# Altium PCB main_pcb_v0.PcbDoc (part 2 of 2)
Units mil, origin at the board's own origin, x right, y up, seen from the top; angles counter-clockwise.
Board outline 9550 x 4600 mil, 2 copper layers (Top Layer, Bottom Layer); 82 components, 133 nets, 564 pads, 44 vias.
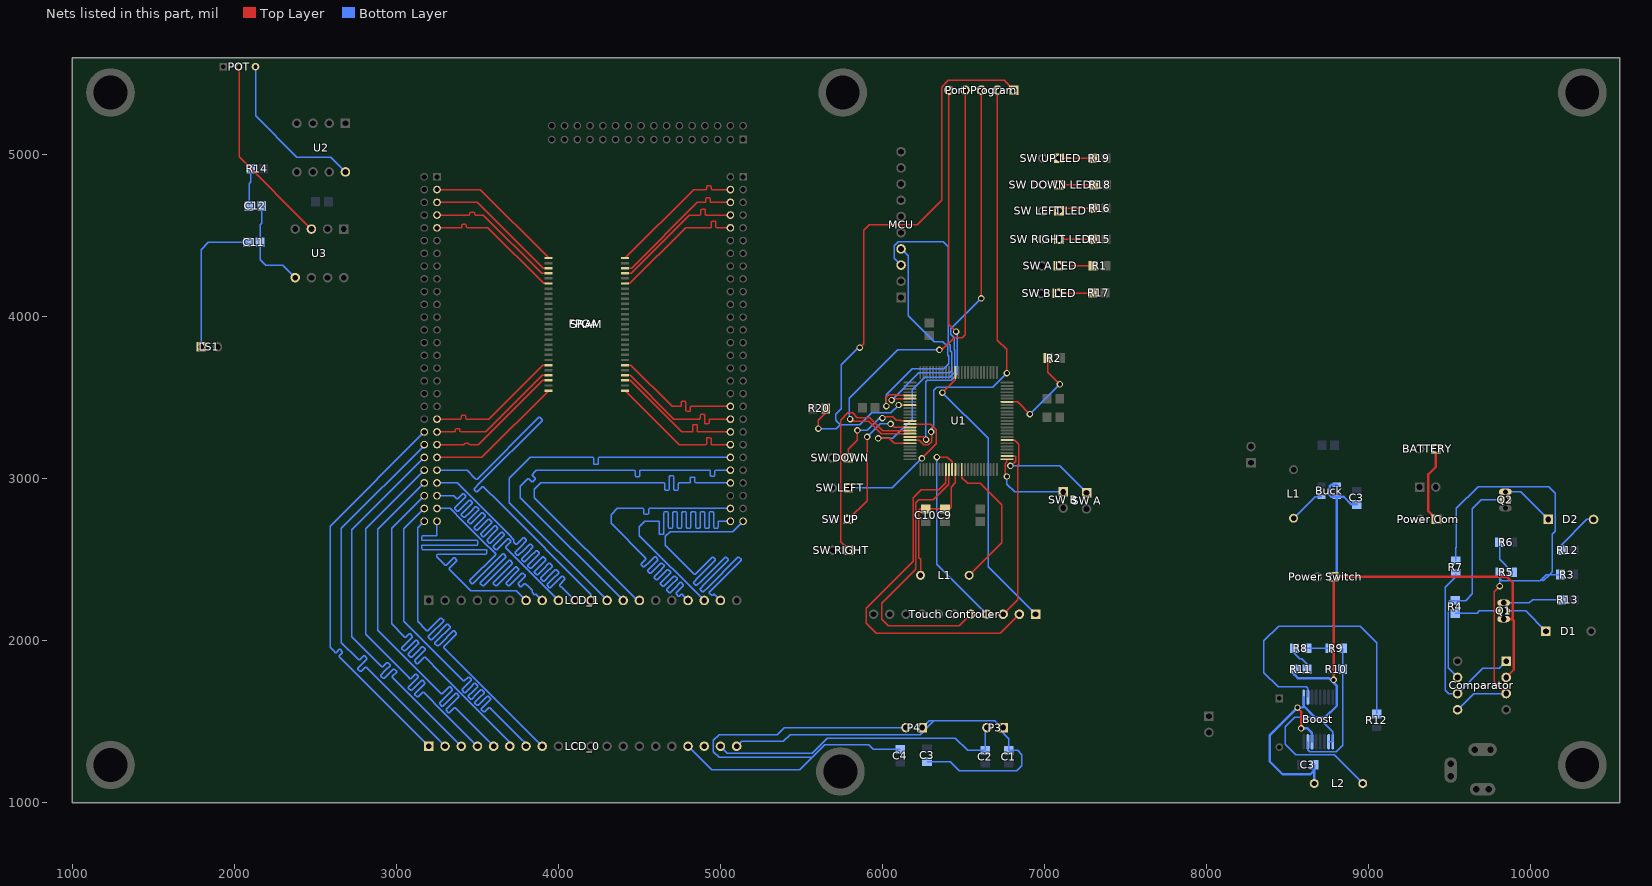
[diagram p2: the nets of this part, all layers, seen from the top]

## Via types
v1: diameter 40, hole 25, Top Layer to Bottom Layer, 44 vias

## Nets (pads, with @x,y where several pads share a name; then routed paths per layer and width w, separated by ;. In a path a pad name is that pad's centre, name@x,y a point inside that pad or via, vN(x,y) a via of type N, cw(c..) or ccw(c..) an arc to the next point about the centre after c; other vN are vias at no path point) (continued)
GREEN0: FPGA.143 LCD_1.7 | length 2495.8
  Bottom Layer w8: FPGA.143@3250.24,2739.02 3250.24,2690 3250.24,2676 3250.24,2652.2 3246.04,2648 3159.06,2648 3154.86,2643.8 3154.86,2624.2 3159.06,2620 3250.24,2620 3498.1,2620 3502.3,2615.8 3502.3,2596.2 3498.1,2592 3250.24,2592 3159.06,2592 3154.86,2587.8 3154.86,2568.2 3159.06,2564 3250.24,2564 3554.1,2564 3558.3,2559.8 3558.3,2540.2 3554.1,2536 3254.44,2536 3250.24,2531.8 3250.24,2518.17 3274.2,2494.2 3284.1,2484.3 3300.93,2467.47 3306.87,2467.47 3352.84,2513.44 3358.78,2513.44 3372.64,2499.58 3372.64,2493.64 3326.67,2447.67 3326.67,2441.73 3373.4,2395 3458.4,2310 3738.34,2310 3798.34,2250 LCD_1.7@3800,2250
GREEN1: FPGA.141 LCD_1.8 | length 2495.6
  Bottom Layer w8: FPGA.141@3250.24,2817.76 3332.24,2817.76 3410,2740 3527.5,2622.5 3611.64,2538.36 3611.64,2532.42 3452.42,2373.2 3452.42,2367.26 3466.28,2353.4 3472.22,2353.4 3634.41,2515.59 3655.8,2536.98 3661.74,2536.98 3675.6,2523.12 3675.6,2517.18 3654.21,2495.79 3518.83,2360.42 3518.83,2354.48 3532.69,2340.62 3538.63,2340.62 3674.01,2475.99 3695.4,2497.38 3701.34,2497.38 3715.2,2483.52 3715.2,2477.58 3693.81,2456.19 3598.03,2360.42 3598.03,2354.48 3611.89,2340.62 3617.83,2340.62 3713.61,2436.39 3735,2457.78 3740.94,2457.78 3754.79,2443.93 3754.79,2437.99 3733.4,2416.6 3677.23,2360.42 3677.23,2354.48 3691.09,2340.62 3697.03,2340.62 3753.2,2396.8 3774.59,2418.19 3780.53,2418.19 3794.39,2404.33 3794.39,2398.39 3773,2377 3750.78,2354.78 3750.78,2348.84 3764.64,2334.98 3770.58,2334.98 3789.83,2354.23 3795.77,2354.23 3812.6,2337.4 3822.5,2327.5 3837.33,2312.67 3837.33,2306.73 3836.96,2306.36 3836.96,2300.42 3850.82,2286.56 3856.76,2286.56 3857.13,2286.93 3863.07,2286.93 3870,2280 LCD_1.8@3900,2250
GREEN2: FPGA.139 LCD_1.9 | length 2495.3
  Bottom Layer w8: FPGA.139@3250.24,2896.5 3295,2896.5 3353.5,2896.5 3365,2885 3371.93,2878.07 3377.87,2878.07 3408.62,2908.82 3414.56,2908.82 3428.42,2894.96 3428.42,2889.02 3394.7,2855.3 3360.98,2821.58 3360.98,2815.64 3374.84,2801.79 3380.78,2801.79 3414.5,2835.5 3448.21,2869.22 3454.15,2869.22 3468.01,2855.36 3468.01,2849.42 3434.3,2815.7 3400.58,2781.99 3400.58,2776.05 3414.44,2762.19 3420.38,2762.19 3454.1,2795.9 3487.81,2829.62 3493.75,2829.62 3507.61,2815.76 3507.61,2809.82 3473.89,2776.11 3440.18,2742.39 3440.18,2736.45 3454.04,2722.59 3459.98,2722.59 3493.69,2756.31 3527.41,2790.02 3533.35,2790.02 3547.21,2776.16 3547.21,2770.22 3513.49,2736.51 3479.78,2702.79 3479.78,2696.85 3493.63,2682.99 3499.57,2682.99 3533.29,2716.71 3567.01,2750.43 3572.95,2750.43 3586.81,2736.57 3586.81,2730.63 3553.09,2696.91 3519.37,2663.19 3519.37,2657.25 3533.23,2643.39 3539.17,2643.39 3572.89,2677.11 3606.61,2710.83 3612.55,2710.83 3626.41,2696.97 3626.41,2691.03 3592.69,2657.31 3558.97,2623.59 3558.97,2617.65 3572.83,2603.8 3578.77,2603.8 3612.49,2637.51 3646.2,2671.23 3652.14,2671.23 3666,2657.37 3666,2651.43 3632.29,2617.71 3598.57,2584 3598.57,2578.06 3612.43,2564.2 3618.37,2564.2 3652.09,2597.91 3685.8,2631.63 3691.74,2631.63 3705.6,2617.77 3705.6,2611.83 3674.85,2581.09 3674.85,2575.15 3770,2480 3900,2350 LCD_1.9@4000,2250
GREEN3: FPGA.137 LCD_1.10 | length 2495.3
  Bottom Layer w8: FPGA.137@3250.24,2975.24 3374.76,2975.24 3529.23,2820.77 3692.5,2657.5 3725.15,2624.85 3725.15,2618.91 3722.64,2616.41 3722.64,2610.47 3736.5,2596.61 3742.44,2596.61 3747.91,2602.09 3782.89,2637.06 3788.83,2637.06 3802.68,2623.2 3802.68,2617.26 3767.71,2582.29 3732.74,2547.32 3732.74,2541.38 3746.6,2527.52 3752.54,2527.52 3787.51,2562.49 3822.48,2597.46 3828.42,2597.46 3842.28,2583.6 3842.28,2577.66 3807.31,2542.69 3772.34,2507.72 3772.34,2501.78 3786.2,2487.92 3792.14,2487.92 3827.11,2522.89 3862.08,2557.86 3868.02,2557.86 3881.88,2544 3881.88,2538.06 3846.91,2503.09 3811.94,2468.12 3811.94,2462.18 3825.8,2448.32 3831.74,2448.32 3866.71,2483.29 3901.68,2518.26 3907.62,2518.26 3921.48,2504.4 3921.48,2498.46 3886.51,2463.49 3851.54,2428.52 3851.54,2422.58 3865.4,2408.72 3871.34,2408.72 3906.31,2443.69 3941.28,2478.66 3947.22,2478.66 3961.08,2464.81 3961.08,2458.87 3926.11,2423.89 3891.13,2388.92 3891.13,2382.98 3904.99,2369.12 3910.93,2369.12 3945.9,2404.1 3980.88,2439.07 3986.82,2439.07 4000.67,2425.21 4000.67,2419.27 3965.7,2384.3 3930.73,2349.33 3930.73,2343.39 3944.59,2329.53 3950.53,2329.53 3985.5,2364.5 4020.47,2399.47 4026.41,2399.47 4040.27,2385.61 4040.27,2379.67 4008.27,2347.67 4008.27,2341.73 4025.1,2324.9 4035,2315 4044.32,2305.68 LCD_1.10@4100,2250
GREEN4: FPGA.135 LCD_1.11 | length 2495.3
  Bottom Layer w8: FPGA.135@3250.24,3053.98 3435.55,3053.98 3484.53,3005 3491.46,2998.07 3497.4,2998.07 3879.6,3380.28 3885.54,3380.28 3899.4,3366.42 3899.4,3360.48 3514.22,2975.3 3479.61,2940.69 3479.61,2934.75 3493.47,2920.89 3499.41,2920.89 3531.05,2952.53 3536.99,2952.53 3639.76,2849.76 4200,2289.53 LCD_1.11@4200,2250
GREEN5: FPGA.46 LCD_1.12 | length 2495.3
  Bottom Layer w8: LCD_1.12@4300,2250 3697.03,2852.97 3697.03,3005 3824.74,3132.72 4213.8,3132.72 4218,3128.52 4218,3095.28 4222.2,3091.08 4241.8,3091.08 4246,3095.28 4246,3128.52 4250.2,3132.72 4260,3132.72 FPGA.46@5061.26,3132.72
GREEN6: FPGA.48 LCD_1.13 | length 2495.3
  Bottom Layer w8: LCD_1.13@4400,2250 3765,2885 3765,2955 3811.51,3001.51 3817.45,3001.51 3835.89,2983.06 3841.83,2983.06 3855.69,2996.92 3855.69,3002.86 3837.25,3021.31 3837.25,3027.25 3854.08,3044.08 3863.98,3053.98 4468.8,3053.98 4473,3049.78 4473,3018.87 4477.2,3014.67 4496.8,3014.67 4501,3018.87 4501,3049.78 4505.2,3053.98 4515,3053.98 4870,3053.98 4933.8,3053.98 4938,3049.78 4938,3022.19 4942.2,3017.99 4961.8,3017.99 4966,3022.19 4966,3049.78 4970.2,3053.98 4980,3053.98 FPGA.48@5061.26,3053.98
GREEN7: FPGA.50 LCD_1.14 | length 2497.7
  Bottom Layer w8: LCD_1.14@4500,2250 4485,2250 3850,2885 3850,2935.47 3889.76,2975.24 4652.8,2975.24 4657,2971.04 4657,2935.42 4661.2,2931.22 4680.8,2931.22 4685,2935.42 4685,2975.24 4685,3015.05 4689.2,3019.25 4708.8,3019.25 4713,3015.05 4713,2975.24 4713,2935.43 4717.2,2931.22 4736.8,2931.22 4741,2935.43 4741,2971.04 4745.2,2975.24 4755,2975.24 4800,2975.24 4809.8,2975.24 4814,2979.44 4814,3007.02 4818.2,3011.22 4837.8,3011.22 4842,3007.02 4842,2979.44 4846.2,2975.24 4895,2975.24 FPGA.50@5061.26,2975.24
HSYNC: FPGA.56 LCD_1.18 | length 2495.3
  Bottom Layer w8: LCD_1.18@4900,2250 4500,2650 4500,2705 4534.02,2739.02 4617.8,2739.02 4622,2734.82 4622,2663.09 4626.2,2658.89 4645.8,2658.89 4650,2663.09 4650,2739.02 4650,2792.51 4654.2,2796.71 4673.8,2796.71 4678,2792.51 4678,2739.02 4678,2700.25 4682.2,2696.05 4701.8,2696.05 4706,2700.25 4706,2739.02 4706,2792.51 4710.2,2796.71 4729.8,2796.71 4734,2792.51 4734,2739.02 4734,2700.25 4738.2,2696.05 4757.8,2696.05 4762,2700.25 4762,2739.02 4762,2792.51 4766.2,2796.71 4785.8,2796.71 4790,2792.51 4790,2739.02 4790,2700.25 4794.2,2696.05 4813.8,2696.05 4818,2700.25 4818,2739.02 4818,2792.51 4822.2,2796.71 4841.8,2796.71 4846,2792.51 4846,2739.02 4846,2700.25 4850.2,2696.05 4869.8,2696.05 4874,2700.25 4874,2739.02 4874,2792.51 4878.2,2796.71 4897.8,2796.71 4902,2792.51 4902,2739.02 4902,2700.25 4906.2,2696.05 4925.8,2696.05 4930,2700.25 4930,2739.02 4930,2792.51 4934.2,2796.71 4953.8,2796.71 4958,2792.51 4958,2739.02 4958,2700.25 4962.2,2696.05 4981.8,2696.05 4986,2700.25 4986,2734.82 4990.2,2739.02 5000,2739.02 5010,2739.02 FPGA.56@5061.26,2739.02
IMU_SCL: MCU.3 U1.81 | length 1829.9
  Top Layer w8: v1(6057,3487) 6065.75,3495.75 U1.81@6169.61,3495.75
  Bottom Layer w8: v1(6057,3487) 6225,3655 6415,3655 6429.19,3669.19 6429.19,3781.17 6418.69,3791.67 6418.69,3824.88 6405,3838.57 6405,4433 6375,4463 6096,4463 6072,4439 6072,4363 MCU.3@6115,4320
IMU_SDA: MCU.4 U1.80 | length 1606.8
  Top Layer w8: v1(6024,3449.43) 6024,3504 6040.18,3520.18 6090,3520.18 6094.75,3515.43 U1.80@6169.61,3515.43
  Bottom Layer w8: v1(6024,3449.43) 6024,3520.18 6183.82,3680 6378.14,3680 6410.14,3712 6410.14,3755.86 6401.69,3764.31 6401.69,3817.84 6372.4,3847.13 6318.87,3847.13 6158,4008 6158,4377 MCU.4@6115,4420
IO0: FPGA.127 SRAM.22 | length 863
  Top Layer w8: FPGA.127@3250.24,3368.94 3385.8,3368.94 3395.6,3368.94 3399.8,3373.14 3399.8,3387.63 3404,3391.83 3423.6,3391.83 3427.8,3387.63 3427.8,3373.14 3432,3368.94 3540,3368.94 3570.47,3368.94 3904.17,3702.64 SRAM.22@3939.06,3702.64
IO1: FPGA.129 SRAM.24 | length 863
  Top Layer w8: FPGA.129@3250.24,3290.2 3350,3290.2 3359.8,3290.2 3364,3294.4 3364,3305.63 3368.2,3309.83 3387.8,3309.83 3392,3305.63 3392,3294.4 3396.2,3290.2 3430,3290.2 3550.67,3290.2 3900.12,3639.65 SRAM.24@3939.06,3639.65
IO2: FPGA.131 SRAM.25 | length 863.8
  Top Layer w8: FPGA.131@3250.24,3211.46 3405,3211.46 3414.8,3211.46 3419,3215.66 3419,3217.53 3423.2,3221.73 3442.8,3221.73 3447,3217.53 3447,3215.66 3451.2,3211.46 3455,3211.46 3505.51,3211.46 3902.2,3608.15 SRAM.25@3939.06,3608.15
IO3: FPGA.133 SRAM.27 | length 859.7
  Top Layer w8: FPGA.133@3250.24,3132.72 3526.62,3132.72 SRAM.27@3939.06,3545.16
IO4: FPGA.44 SRAM.28 | length 863
  Top Layer w8: SRAM.28@4411.5,3545.16 4745.2,3211.46 4900,3211.46 4909.8,3211.46 4914,3215.66 4914,3249.68 4918.2,3253.88 4937.8,3253.88 4942,3249.68 4942,3215.66 4946.2,3211.46 4985,3211.46 FPGA.44@5061.26,3211.46
IO5: FPGA.42 SRAM.30 | length 863
  Top Layer w8: SRAM.30@4411.5,3608.15 4443.78,3608.15 4761.73,3290.2 4815,3290.2 4824.8,3290.2 4829,3294.4 4829,3331.68 4833.2,3335.88 4852.8,3335.88 4857,3331.68 4857,3294.4 4861.2,3290.2 4965,3290.2 FPGA.42@5061.26,3290.2
IO6: FPGA.40 SRAM.31 | length 863
  Top Layer w8: SRAM.31@4411.5,3639.65 4441.93,3639.65 4712.64,3368.94 4860,3368.94 4869.8,3368.94 4874,3373.14 4874,3393.7 4878.2,3397.9 4897.8,3397.9 4902,3393.7 4902,3368.94 4902,3344.17 4906.2,3339.97 4925.8,3339.97 4930,3344.17 4930,3364.74 4934.2,3368.94 4980,3368.94 FPGA.40@5061.26,3368.94
IO7: FPGA.38 SRAM.33 | length 863
  Top Layer w8: SRAM.33@4411.5,3702.64 4447.36,3702.64 4702.32,3447.68 4745,3447.68 4754.8,3447.68 4759,3451.88 4759,3474.07 4763.2,3478.27 4782.8,3478.27 4787,3474.07 4787,3447.68 4787,3421.28 4791.2,3417.08 4810.8,3417.08 4815,3421.28 4815,3443.48 4819.2,3447.68 4840,3447.68 FPGA.38@5061.26,3447.68
IO8: FPGA.10 SRAM.49 | length 863
  Top Layer w8: SRAM.49@4411.5,4206.57 4441.57,4206.57 4785.04,4550.04 4930,4550.04 4939.8,4550.04 4944,4554.24 4944,4586.24 4948.2,4590.44 4967.8,4590.44 4972,4586.24 4972,4554.24 4976.2,4550.04 5035,4550.04 FPGA.10@5061.26,4550.04
IO9: FPGA.8 SRAM.51 | length 863
  Top Layer w8: SRAM.51@4411.5,4269.57 4449.57,4269.57 4808.78,4628.78 4865,4628.78 4874.8,4628.78 4879,4632.98 4879,4661.72 4883.2,4665.92 4902.8,4665.92 4907,4661.72 4907,4632.98 4911.2,4628.78 4955,4628.78 FPGA.8@5061.26,4628.78
IO10: FPGA.6 SRAM.52 | length 863.7
  Top Layer w8: SRAM.52@4411.5,4301.06 4451.06,4301.06 4857.52,4707.52 4895,4707.52 4904.8,4707.52 4909,4711.72 4909,4731.03 4913.2,4735.23 4932.8,4735.23 4937,4731.03 4937,4711.72 4941.2,4707.52 4995,4707.52 FPGA.6@5061.26,4707.52
IO11: FPGA.4 SRAM.54 | length 863
  Top Layer w8: SRAM.54@4411.5,4364.05 4833.7,4786.26 4900,4786.26 4909.8,4786.26 4914,4790.46 4914,4806.15 4918.2,4810.35 4937.8,4810.35 4942,4806.15 4942,4790.46 4946.2,4786.26 4985,4786.26 FPGA.4@5061.26,4786.26
IO12: FPGA.91 SRAM.1 | length 863.7
  Top Layer w8: FPGA.91@3250.24,4786.26 3516.85,4786.26 SRAM.1@3939.06,4364.05
IO13: FPGA.93 SRAM.3 | length 857.2
  Top Layer w8: FPGA.93@3250.24,4707.52 3498.54,4707.52 3905,4301.06 SRAM.3@3939.06,4301.06
IO14: FPGA.95 SRAM.4 | length 863
  Top Layer w8: FPGA.95@3250.24,4628.78 3440,4628.78 3449.8,4628.78 3454,4632.98 3454,4642.19 3458.2,4646.39 3477.8,4646.39 3482,4642.19 3482,4632.98 3486.2,4628.78 3537.22,4628.78 3896.43,4269.57 SRAM.4@3939.06,4269.57
IO15: FPGA.97 SRAM.6 | length 863
  Top Layer w8: FPGA.97@3250.24,4550.04 3390,4550.04 3399.8,4550.04 3404,4554.24 3404,4566.71 3408.2,4570.91 3427.8,4570.91 3432,4566.71 3432,4554.24 3436.2,4550.04 3564.96,4550.04 3908.43,4206.57 SRAM.6@3939.06,4206.57
LBI: Boost.7 R9.1 R10.2 | length 884.1
  Bottom Layer w8: Boost.7@8626.02,1377.4 8626.02,1328 8637.02,1317 8800,1317 8840.24,1357.24 R10.2@8840.24,1825.2 8840.24,1955.2 R9.1@8841.5,1955.2
NetBoost_1: Boost.1 Boost.2 L2.2 | length 1133.9
  Bottom Layer w8: Boost.2@8753.98,1377.4 8753.98,1377 8779.57,1377 Boost.1@8779.57,1377.4 8779.57,1440 8710.07,1509.5 8659.38,1509.5 8638.88,1530 8545,1530 8485,1470 8485,1362 8550,1297 8788.2,1297 L2.2@8965,1120.2
NetBoost_10: Boost.10 R12.2@9050,1549.37 | length 1774.4
  Bottom Layer w8: Boost.10@8626.02,1652.99 8626.02,1707.98 8616,1718 8442,1718 8355,1805 8355,2000 8445,2090 8948,2090 9050,1988 R12.2@9050,1549.37
NetBuck_4: Buck.4 L1.1@8537.76,2757.6 | length 227.7
  Bottom Layer w8: L1.1@8537.76,2757.6 8670.35,2890.2 Buck.4@8710.51,2890.2
NetC9_2: C9.2 C10.2 L1.2@6235,2405 U1.12 | length 859.9
  Top Layer w8: L1.2@6235,2405 6235,2503 6223,2515 6223,2806.75 6232,2815.75 C10.2@6266.06,2815.75 6266.06,2816 6336.75,2816 6337,2815.75 C9.2@6386.06,2815.75 6416,2815.75 6424,2823.75 6424,2948.88 6450.12,2975 U1.12@6450.12,3057.76
NetC11_1: C11.1 C12.2 U3.5 | length 598.7
  Bottom Layer w8: C12.2@2168.74,4685 2168.74,4577.74 2158.74,4567.74 C11.1@2158.74,4460 2158.74,4352 2192.18,4318.56 2299,4318.56 U3.5@2375,4242.56
NetC11_2: C11.2 LS1.1 | length 904.2
  Bottom Layer w8: LS1.1@1795,3815 1795,4416 1839,4460 C11.2@2080,4460
NetC12_1: C12.1 R14.2 | length 234.4
  Bottom Layer w8: C12.1@2090,4685 2090,4822.37 2100.63,4833 R14.2@2100.63,4915
NetComparator_1: Comparator.1 Comparator.6 R7.2 | length 1213.7
  Bottom Layer w8: R7.2@9540,2416.26 9540,2396 9475,2331 9475,1696 9496,1675 Comparator.6@9550,1675 9706,1831 9806,1831 Comparator.1@9850,1875
NetComparator_3: Comparator.3 Comparator.5 R3.1 R5.2 R7.1 | length 3123.6
  Top Layer w8: v1(9810.63,2339) 9776,2304.37 9776,1749 Comparator.3@9850,1675
  Bottom Layer w8: R7.1@9540,2495 9540,2574 9543,2577 9543,2818 9678,2953 10112,2953 10153,2912 10153,2677 10136,2660 10136,2428 10118,2410 ; Comparator.5@9550,1575 9650,1675 Comparator.3@9850,1675 ; v1(9810.63,2339) 9810.63,2384 ; R5.2@9810.63,2425 9810.63,2384 ; R3.1@10186.26,2410 10118,2410 ; 9810.63,2384 9822.63,2372 10061,2372 10070.5,2381.5 ; 10070.5,2381.5 10099,2410 10118,2410 ; 10070.5,2381.5 10080,2372 10118,2410
NetComparator_7: Comparator.7 Q2.2 R4.1 | length 1410.9
  Bottom Layer w8: Comparator.7@9550,1775 9492,1833 9492,2240 9501.37,2249.37 R4.1@9535,2249.37 9600,2249.37 9641,2290.37 9641,2816 9695,2870 Q2.2@9845,2870
NetD1_2: D1.2 Q1.2 R4.2 | length 618
  Bottom Layer w8: R4.2@9535,2170.63 9670.63,2170.63 9685,2185 Q1.2@9835,2185 9970.24,2185 D1.2@10095.24,2060
NetD2_1: D2.1 R12.2@10190.63,2560 | length 296.6
  Bottom Layer w8: R12.2@10190.63,2560 10190.63,2592 10348.63,2750 D2.1@10389.76,2750
NetD2_2: D2.2 Q2.1 | length 335.7
  Bottom Layer w8: Q2.1@9845,2920 9940.24,2920 D2.2@10110.24,2750
NetPOT_2: POT.2 U3.3 | length 1186.8
  Top Layer w8: POT.2@2030,5545 2030,4987.56 U3.3@2475,4542.56
NetPOT_3: POT.3 U2.8 | length 1002.3
  Bottom Layer w8: POT.3@2130,5545 2130,5241 2385,4986 2594,4986 U2.8@2685,4895
NetQ1_1: Q1.1 R13.1 | length 363.9
  Bottom Layer w8: Q1.1@9835,2235 9993,2235 10013,2255 R13.1@10190.63,2255
NetR1_2: "SW A LED.1" R1.2 | length 215.6
  Top Layer w8: 7085,4315 R1.2@7300.63,4315
NetR2_1: R2.1 U1.44 | length 624.8
  Top Layer w8: U1.44@6770,3476.06 6833.94,3476.06 v1(6910,3400) ; R2.1@7021.26,3746.38 7021.26,3658 v1(7094.63,3584.63)
  Bottom Layer w8: v1(6910,3400) v1(7094.63,3584.63)
NetR5_1: R5.1 R6.2 | length 218.1
  Bottom Layer w8: R6.2@9810,2610 9810,2504 9889,2425 R5.1@9889.37,2425
NetR8_1: R8.1 R9.2 | length 141.7
  Bottom Layer w8: R8.1@8621.5,1955.2 8621.5,1955 8762.76,1955 R9.2@8762.76,1955.2
NetR8_2: R8.2 R11.1 | length 169.3
  Bottom Layer w8: R8.2@8542.76,1955.2 8542.76,1923.24 8576,1890 8587.5,1890 8621.5,1856 R11.1@8621.5,1825.2
NetR15_2: "SW RIGHT LED.1" R15.2 | length 210.6
  Top Layer w8: 7090,4480 R15.2@7300.63,4480
NetR16_2: "SW LEFT LED.1" R16.2 | length 225.6
  Top Layer w8: 7090,4655 7090,4670 R16.2@7300.63,4670
NetR17_2: "SW B LED.1" R17.2 | length 220.3
  Top Layer w8: 7080,4145 7296.26,4145 R17.2@7296.26,4149.05
NetR18_2: "SW DOWN LED.1" R18.2 | length 215.6
  Top Layer w8: 7090,4815 R18.2@7305.63,4815
NetR19_2: "SW UP LED.1" R19.2 | length 210
  Top Layer w8: 7090,4980 R19.2@7300,4980
ON/OFF: FPGA.54 LCD_1.17 | length 2495.3
  Bottom Layer w8: LCD_1.17@4800,2250 4770,2280 4763.07,2286.93 4757.13,2286.93 4746.9,2276.7 4740.96,2276.7 4727.1,2290.56 4727.1,2296.5 4740.3,2309.7 4771.55,2340.95 4771.55,2346.89 4757.69,2360.75 4751.75,2360.75 4720.5,2329.5 4689.25,2298.25 4683.31,2298.25 4669.45,2312.11 4669.45,2318.05 4700.7,2349.3 4731.95,2380.55 4731.95,2386.49 4718.09,2400.34 4712.15,2400.34 4680.9,2369.1 4649.66,2337.85 4643.72,2337.85 4629.86,2351.71 4629.86,2357.65 4661.11,2388.89 4692.35,2420.14 4692.35,2426.08 4678.5,2439.94 4672.56,2439.94 4641.31,2408.69 4610.06,2377.44 4604.12,2377.44 4590.26,2391.3 4590.26,2397.24 4621.51,2428.49 4652.76,2459.74 4652.76,2465.68 4638.9,2479.54 4632.96,2479.54 4601.71,2448.29 4570.46,2417.04 4564.52,2417.04 4550.66,2430.9 4550.66,2436.84 4581.91,2468.09 4613.16,2499.34 4613.16,2505.28 4599.3,2519.14 4593.36,2519.14 4562.11,2487.89 4530.86,2456.64 4524.92,2456.64 4511.06,2470.5 4511.06,2476.44 4539.34,2504.72 4539.34,2510.66 4325,2725 4325,2780 4362.76,2817.76 4430,2817.76 4523.8,2817.76 4528,2813.56 4528,2785.97 4532.2,2781.77 4551.8,2781.77 4556,2785.97 4556,2813.56 4560.2,2817.76 4570,2817.76 FPGA.54@5061.26,2817.76
Power_Common: "Power Com.1" BATTERY.1 | length 475.4
  Top Layer w15: BATTERY.1@9415.63,3185 9415.63,3074.63 9369,3028 9369,2801 9420,2750
RED0: FPGA.130 LCD_0.1 | length 2495.3
  Bottom Layer w8: FPGA.130@3171.5,3290.2 2590,2708.7 2590,1960 2615,1935 2621.93,1928.07 2627.87,1928.07 2647.18,1947.39 2653.12,1947.39 2666.98,1933.53 2666.98,1927.59 2647.67,1908.27 2647.67,1902.33 2907.5,1642.5 LCD_0.1@3200,1350
RED1: FPGA.132 LCD_0.2 | length 2495.1
  Bottom Layer w8: FPGA.132@3173.98,3208.98 2660,2695 2660,1990 2760,1890 2766.93,1883.07 2772.87,1883.07 2797.49,1907.69 2803.43,1907.69 2817.28,1893.83 2817.28,1887.89 2789.7,1860.3 2762.11,1832.72 2762.11,1826.78 2775.97,1812.92 2781.91,1812.92 2806.53,1837.53 2812.47,1837.53 3077.5,1572.5 LCD_0.2@3300,1350
RED2: FPGA.134 LCD_0.3 | length 2495.3
  Bottom Layer w8: FPGA.134@3171.5,3132.72 2725,2686.22 2725,2025 2902.5,1847.5 2909.43,1840.57 2915.37,1840.57 2940.98,1866.19 2946.92,1866.19 2960.78,1852.33 2960.78,1846.39 2932.2,1817.8 2903.61,1789.22 2903.61,1783.28 2917.47,1769.42 2923.41,1769.42 2952,1798 2980.58,1826.59 2986.52,1826.59 3000.38,1812.73 3000.38,1806.79 2974.77,1781.17 2974.77,1775.23 3125,1625 LCD_0.3@3400,1350
RED3: FPGA.136 LCD_0.4 | length 2495.3
  Bottom Layer w8: FPGA.136@3171.5,3053.98 2810,2692.48 2810,2040 3075,1775 3081.93,1768.07 3087.87,1768.07 3115.55,1795.75 3121.49,1795.75 3135.35,1781.89 3135.35,1775.95 3104.7,1745.3 3074.05,1714.65 3074.05,1708.71 3087.9,1694.85 3093.84,1694.85 3124.5,1725.5 3155.15,1756.16 3161.09,1756.16 3174.95,1742.3 3174.95,1736.36 3144.3,1705.7 3113.64,1675.05 3113.64,1669.11 3127.5,1655.25 3133.44,1655.25 3161.13,1682.93 3167.07,1682.93 3290,1560 LCD_0.4@3500,1350
RED4: FPGA.138 LCD_0.5 | length 2495.3
  Bottom Layer w8: FPGA.138@3171.5,2975.24 2885,2688.74 2885,2065 3270,1680 3276.93,1673.07 3282.87,1673.07 3325.59,1715.79 3331.53,1715.79 3345.39,1701.93 3345.39,1696 3299.7,1650.3 3266.5,1617.11 3266.5,1611.17 3280.36,1597.31 3286.3,1597.31 3319.5,1630.5 3365.19,1676.2 3371.13,1676.2 3384.99,1662.34 3384.99,1656.4 3339.3,1610.7 3306.1,1577.51 3306.1,1571.57 3319.96,1557.71 3325.9,1557.71 3356.13,1587.93 3362.07,1587.93 3550,1400 LCD_0.5@3600,1350
RED5: FPGA.140 LCD_0.6 | length 2496.8
  Bottom Layer w8: FPGA.140@3171.5,2896.5 2970,2695 2970,2105 3045,2030 3051.93,2023.07 3057.87,2023.07 3078.47,2043.67 3084.41,2043.67 3098.27,2029.81 3098.27,2023.87 3074.7,2000.3 3033.63,1959.23 3033.63,1953.29 3047.49,1939.43 3053.43,1939.43 3094.5,1980.5 3118.07,2004.07 3124.01,2004.07 3137.87,1990.21 3137.87,1984.27 3114.3,1960.7 3073.23,1919.63 3073.23,1913.69 3087.09,1899.84 3093.03,1899.84 3134.1,1940.9 3157.66,1964.47 3163.6,1964.47 3177.46,1950.61 3177.46,1944.67 3153.89,1921.11 3112.83,1880.04 3112.83,1874.1 3126.68,1860.24 3132.62,1860.24 3170.72,1898.34 3176.66,1898.34 3275,1800 3700,1375 LCD_0.6@3700,1350
RED6: FPGA.142 LCD_0.7 | length 2497.7
  Bottom Layer w8: FPGA.142@3171.5,2817.76 3045,2691.26 3045,2120 3405,1760 3411.93,1753.07 3417.87,1753.07 3442.02,1777.22 3447.96,1777.22 3461.82,1763.36 3461.82,1757.42 3434.7,1730.3 3405.08,1700.68 3405.08,1694.74 3418.94,1680.88 3424.88,1680.88 3454.5,1710.5 3481.62,1737.62 3487.56,1737.62 3501.42,1723.76 3501.42,1717.82 3474.3,1690.7 3444.68,1661.08 3444.68,1655.14 3458.54,1641.28 3464.47,1641.28 3494.1,1670.9 3521.22,1698.02 3527.16,1698.02 3541.01,1684.17 3541.01,1678.23 3513.89,1651.11 3484.27,1621.49 3484.27,1615.55 3498.13,1601.69 3504.07,1601.69 3533.69,1631.31 3560.81,1658.43 3566.75,1658.43 3580.61,1644.57 3580.61,1638.63 3553.49,1611.51 3523.87,1581.89 3523.87,1575.95 3537.73,1562.09 3543.67,1562.09 3570.32,1588.74 3576.26,1588.74 3762.5,1402.5 3800,1365 LCD_0.7@3800,1350
RED7: FPGA.144 LCD_0.8 | length 2962
  Bottom Layer w8: FPGA.144@3171.5,2739.02 3130,2697.52 3130,2120 3180,2070 3186.93,2063.07 3192.87,2063.07 3271.19,2141.39 3277.13,2141.39 3290.99,2127.53 3290.99,2121.59 3209.7,2040.3 3197.69,2028.29 3197.69,2022.35 3211.55,2008.5 3217.49,2008.5 3229.5,2020.5 3310.79,2101.79 3316.73,2101.79 3330.59,2087.93 3330.59,2081.99 3249.3,2000.7 3237.29,1988.7 3237.29,1982.76 3251.15,1968.9 3257.09,1968.9 3269.1,1980.9 3350.39,2062.2 3356.33,2062.2 3370.18,2048.34 3370.18,2042.4 3291.86,1964.08 3291.86,1958.14 3365,1885 LCD_0.8@3900,1350 3570,1680
RST_NMI_N: "Port Program.1" R20.1 U1.83 | length 3800.6
  Top Layer w8: v1(5605,3310) 5605,3362.95 5650,3407.95 R20.1@5650,3435 ; v1(5860,3810) 5885,3835 5885,4535 5920,4570 6214,4570 6365,4721 6365,5419 6405.53,5459.53 6750.47,5459.53 6810,5400 ; v1(6100,3456.38) U1.83@6169.61,3456.38
  Bottom Layer w8: v1(5605,3310) 5715,3310 5740,3335 ; v1(5860,3810) 5851,3810 5745,3704 5747,3702 5747,3433.67 5712,3398.67 5712,3363 5740,3335 ; v1(6100,3456.38) 6051.62,3408 5933.27,3408 5860.27,3335 5740,3335
SWCLKTCK: "Port Program.3" U1.95 | length 2784.5
  Top Layer w8: v1(5974.13,3250) 6043,3250 6072.84,3220.16 U1.95@6169.61,3220.16 ; v1(6610,4114) 6610,5400
  Bottom Layer w8: v1(5974.13,3250) 6064.8,3250 6184,3369.2 6184,3550.61 6261,3627.61 6414.8,3627.61 6446.19,3659 6446.19,3794.81 6443,3798 6443,3871.5 6422,3892.5 6422,3926 v1(6610,4114)
SWDIOTMS: "Port Program.2" U1.94 | length 2746.2
  Top Layer w8: U1.94@6169.61,3239.84 6226.49,3239.84 6256.33,3210 6283.67,3210 6303,3229.33 6303,3287 v1(6300,3290) ; 6710,5400 6710,3857 6768,3799 v1(6768,3653)
  Bottom Layer w8: v1(6300,3290) 6300,3311 6316,3327 6316,3547 6336,3567 6682,3567 v1(6768,3653)
switch_A: "SW A.1" U1.27 | length 665.8
  Top Layer w8: U1.27@6770,3141.42 6818.46,3141.42 6823.36,3136.52 6823.36,3110.36 6793,3080 v1(6790,3080)
  Bottom Layer w8: v1(6790,3080) 7095,3080 7260,2915
switch_B: "SW B.1" U1.26 | length 533
  Top Layer w8: v1(6768,3015) 6768,3022 6757,3033 6757,3093.67 6768,3104.67 6768,3121.73 U1.26@6770,3121.73
  Bottom Layer w8: v1(6768,3015) 6768,2968 6816,2920 7116.26,2920
switch_DOWN: "SW DOWN.1" U1.88 | length 568.9
  Top Layer w8: 5790,3130 5790,3184 5845,3239 v1(5845,3300) ; v1(6000,3375) 6010,3385 6062.89,3385 6084.89,3363 6108.67,3363 6113.72,3357.95 U1.88@6169.61,3357.95
  Bottom Layer w8: v1(5845,3300) 5906,3300 5981,3375 v1(6000,3375) v1@6000,3369.9
switch_LEFT: "SW LEFT.1" U1.89 | length 920.6
  Top Layer w8: U1.89@6169.61,3338.27 6298.4,3338.27 6333,3303.67 6333,3216 v1(6244,3127)
  Bottom Layer w8: 5790,2945 6062,2945 v1(6244,3127)
switch_RIGHT: "SW RIGHT.1" U1.91 | length 1319.3
  Top Layer w8: 5795,2560 5740,2615 5741.46,2616.46 5741.46,3362.95 5785.77,3407.27 5815.32,3407.27 5843.58,3379 5921,3379 6003,3297 6108.67,3297 6110.57,3298.9 U1.91@6169.61,3298.9
switch_UP: "SW UP.1" U1.90 | length 871.3
  Top Layer w8: 5790,2750 5905,2865 v1(5905,3260) ; v1(6050,3340) 6071.42,3318.58 U1.90@6169.61,3318.58
  Bottom Layer w8: v1(5905,3260) 5985,3340 v1(6050,3340) v1@6045,3335
TDI_ADC14CLK: "Port Program.4" U1.92 | length 2927.5
  Top Layer w8: v1@5798.54,3370 5797.48,3368.94 v1(5800,3368.94) 5813.94,3355 5916.59,3355 5992.38,3279.21 U1.92@6169.61,3279.21 ; v1(6351.69,3797.13) 6367.13,3797.13 6442.45,3872.45 6491.82,3872.45 6510,3890.63 6510,5400
  Bottom Layer w8: v1(5800,3368.94) 5796,3372.94 5796,3498 6095.13,3797.13 v1(6351.69,3797.13)
TDO_SWO: "Port Program.5" U1.93 | length 2455.6
  Top Layer w8: U1.93@6169.61,3259.53 6253.47,3259.53 v1(6270,3243) ; 6410,5400 6410,3954 v1(6455,3909)
  Bottom Layer w8: v1(6270,3243) 6267,3246 6267,3600 6277.61,3610.61 6425.8,3610.61 6463.19,3648 6463.19,3900.81 v1(6455,3909)
TOUCH_INT: "Touch Controller.3" U1.32 | length 1170.4
  Top Layer w8: 6745,2165 6834,2254 6834,3085.82 6840.36,3092.18 6840.36,3215.49 6816,3239.84 U1.32@6770,3239.84
TOUCH_SCL: "Touch Controller.2" U1.9 | length 2235.6
  Top Layer w8: U1.9@6391.06,3057.76 6391.06,2976 6349.06,2934 6240,2934 6189,2883 6189,2492.56 5899,2202.56 5899,2110 5961,2048 6728,2048 6845,2165
TOUCH_SDA/CS: "Touch Controller.1" U1.64 | length 1764.1
  Top Layer w8: v1(6370.5,3533.5) 6450.12,3613.12 U1.64@6450.12,3658.15
  Bottom Layer w8: v1(6370.5,3533.5) 6653,3251 6653,2457 6945,2165
TOUCH_SDI: "Touch Controller.5" U1.10 | length 1745.2
  Top Layer w8: U1.10@6410.75,3057.76 6410.75,2965.75 6315,2870 6223,2870 6206,2853 6206,2443.56 5995,2232.56 5995,2135 6036,2094 6474,2094 6545,2165
TOUCH_SDO: "Touch Controller.4" U1.11 | length 1251.8
  Top Layer w8: v1(6336,3135) 6400,3135 6430.43,3104.57 U1.11@6430.43,3057.76
  Bottom Layer w8: v1(6336,3135) 6336,2474 6645,2165
V_BAT: "Power Switch.1" Boost.6 Boost.9 Buck.1 Buck.3 C3.1@8664.37,1235.2 C3.2@8927.76,2843.23 Comparator.2 L2.1 Q1.3 R11.2 | length 5147.2
  Top Layer w15: v1(8562,1589) 8560.63,1587.63 8585,1563.26 v1(8585,1460) ; v1(8785,1759) 8785,2395 9856,2395 9891,2360 9891,2144 9882,2135 ; Q1.3@9835,2135 9882,2135 ; Comparator.2@9850,1775 9897,1822 9897,2126 9888,2135 9882,2135
  Bottom Layer w15: R11.2@8542.76,1825.2 8542.76,1792 8564.76,1770 8757,1770 v1@8768,1759 ; v1(8585,1460) 8623.61,1460 8651.61,1432 Boost.6@8651.61,1377.4 ; 8600.43,1600 Boost.9@8600.43,1652.99 ; C3.1@8664.37,1235.2 8664.37,1200 ; L2.1@8665,1120.2 8665,1199.37 8664.37,1200 ; v1(8785,1759) v1@8768,1759 ; 8785,2395 8805,2415 Buck.3@8805,2890.2 ; Buck.1@8805,2965 8771.5,2965 8760,2953.5 8760,2900.2 8770,2890.2 Buck.3@8805,2890.2 ; C3.2@8927.76,2843.23 8894.77,2843.23 8847.8,2890.2 Buck.3@8805,2890.2 ; 8664.37,1200 8641.37,1177 8470,1177 8390,1257 8390,1417 v1(8562,1589) 8592,1589 8600.43,1597.43 8667.87,1530 8735,1530 8805,1600 8805,1722 v1@8768,1759
VSW: L1.1@6535,2405 U1.14 | length 883.9
  Top Layer w8: U1.14@6489.49,3057.76 6489.49,3008 6525.49,2972 6605,2972 6735,2842 6735,2605 L1.1@6535,2405
VSYNC: FPGA.55 LCD_1.19 | length 2495.3
  Bottom Layer w8: LCD_1.19@5000,2250 4975,2275 4970,2280 4963.07,2286.93 4957.13,2286.93 4952.15,2281.95 4946.21,2281.95 4932.35,2295.8 4932.35,2301.74 4940.3,2309.7 5127.8,2497.2 5127.8,2503.14 5113.94,2517 5108,2517 4920.5,2329.5 4894.5,2303.49 4888.56,2303.49 4874.7,2317.35 4874.7,2323.29 4900.7,2349.3 5048.6,2497.2 5048.6,2503.14 5034.75,2517 5028.81,2517 4880.9,2369.1 4854.9,2343.09 4848.96,2343.09 4835.1,2356.95 4835.1,2362.89 4861.11,2388.89 4969.41,2497.2 4969.41,2503.14 4955.55,2517 4949.61,2517 4844.28,2411.66 4838.34,2411.66 4660,2590 4660,2645 4690,2675 5075.98,2675 FPGA.55@5140,2739.02
XL: C2.2@6635,1325 LCD_0.19 P3.2 | length 1866.5
  Bottom Layer w8: LCD_0.19@5000,1350 5043,1307 5566,1307 5659,1400 6450,1400 6525,1325 C2.2@6635,1325 6635,1455 P3.2@6645,1465
XR: C4.2@6110,1330 LCD_0.17 P4.2 | length 3360.3
  Bottom Layer w8: LCD_0.17@4800,1350 4945,1205 5491,1205 5568,1282 ; C4.2@6110,1330 5942,1330 5914,1358 5644,1358 5568,1282 ; P4.2@6145,1465 5395,1465 5351,1421 4992,1421 4957,1386 4957,1317 4992,1282 5568,1282
YD: LCD_0.18
YU: C1.2 C3.2@6275,1255 LCD_0.20 P3.1 P4.1 | length 2745.5
  Bottom Layer w8: LCD_0.20@5100,1350 5131,1381 5389,1381 5430,1422 6232,1422 6318,1508 ; P4.1@6245,1465 6288,1508 6318,1508 ; C3.2@6275,1255 6417.37,1255 6473.37,1199 6830,1199 6861,1230 6861,1299 6835,1325 C1.2@6780,1325 6780,1395 6745,1430 P3.1@6745,1465 ; P3.1@6730,1465 6730,1472 6694,1508 6318,1508
pads on no net: "Power Com.2" "Touch Controller.7" "Touch Controller.8" "Touch Controller.9" Boost.12 Boost.16 Buck.5 FPGA.1 FPGA.2 FPGA.3 FPGA.5 FPGA.7 FPGA.9 FPGA.11 FPGA.13 FPGA.15 FPGA.17 FPGA.19 FPGA.21 FPGA.25 FPGA.27 FPGA.57 FPGA.58 FPGA.59 FPGA.60 FPGA.61 FPGA.62 FPGA.63 FPGA.64 FPGA.65 FPGA.66 FPGA.67 FPGA.68 FPGA.69 FPGA.70 FPGA.71 FPGA.72 FPGA.73 FPGA.74 FPGA.75 FPGA.76 FPGA.77 FPGA.78 FPGA.79 FPGA.80 FPGA.81 FPGA.82 FPGA.83 FPGA.84 FPGA.85 FPGA.86 FPGA.87 FPGA.88 FPGA.89 FPGA.90 FPGA.92 FPGA.94 FPGA.96 FPGA.98 FPGA.100 FPGA.102 FPGA.104 FPGA.106 FPGA.108 FPGA.110 FPGA.114 FPGA.116 FPGA.118 FPGA.120 FPGA.122 FPGA.124 FPGA.126 FPGA.128 LCD_1.3 LCD_1.4 LCD_1.5 LCD_1.6 LCD_1.15 MCU.5 MCU.6 MCU.7 MCU.8 MCU.9 MCU.10 SRAM.16 SRAM.40 SRAM.43 U1.1 U1.2 U1.3 U1.4 U1.5 U1.6 U1.7 U1.8 U1.16 U1.17 U1.18 U1.19 U1.20 U1.21 U1.22 U1.23 U1.24 U1.25 U1.28 U1.29 U1.30 U1.31 U1.33 U1.34 U1.35 U1.39 U1.41 U1.42 U1.46 U1.47 U1.48 U1.49 U1.50 U1.51 U1.52 U1.53 U1.54 U1.55 U1.56 U1.57 U1.58 U1.59 U1.60 U1.61 U1.62 U1.63 U1.65 U1.66 U1.67 U1.69 U1.70 U1.71 U1.74 U1.75 U1.76 U1.85 U1.86 U1.96 U1.97 U1.98 U1.99 U1.100 U2.5 U3.1 U3.7 U3.8

## Polygon pours and split planes (outlines as drawn)
GND on Top Layer "Top Layer-GND" (solid, pour order 14): 1000,1000 1000,5600 10550,5600 10550,1000
5V on Bottom Layer "Bottom Layer-5V" (solid, pour order 16): 1000,1000 1000,5600 10550,5600 10550,1000

## Keep-outs
Keep-Out Layer:
  the board outline again, w10

## Silkscreen, mask and mechanical layers (free items; w line width, h text height)
Top Overlay:
  lines w10: 6165,4070 5520,4070 5520,4090 5520,5070 6165,5070 ; 2495,1300 2495,5325 9045,5325 9045,1280 2515,1280 2495,1300 ; 5895,1415 6995,1415 6995,2215 5895,2215 5895,1415
  text "LCD SCREEN" at 2500,5345 h60
  text "Doodle Boy v1.0" at 9455,5325 h60
  text "Really / Awesome / Men /  /  / Evan Waxman / Chris Critelli" at 1085,1535 h60
Mechanical 22:
  text "G1" at 3118.99,5839.68 h34 r90
  text "LK" at 2618.99,5828.35 h34 r90
  text "LA" at 2718.99,5828.35 h34 r90
  text "G0" at 3018.99,5828.35 h34 r90
  text "G2" at 3218.99,5828.35 h34 r90
  text "G3" at 3318.99,5828.35 h34 r90
  text "G4" at 3418.99,5828.35 h34 r90
  text "G5" at 3518.99,5828.35 h34 r90
  text "G6" at 3618.99,5828.35 h34 r90
  text "G7" at 3718.99,5828.35 h34 r90
  text "DE" at 4318.99,5828.35 h34 r90
  text "GND" at 2518.99,5794.36 h34 r90
  text "PWM" at 2818.99,5794.36 h34 r90
  text "GND" at 3818.99,5794.36 h34 r90
  text "CLK" at 3918.99,5794.36 h34 r90
  text "5VIN" at 2418.99,5766.04 h34 r90
  text "3.3V" at 2918.99,5766.04 h34 r90
  text "HSYNC" at 4118.99,5726.38 h34 r90
  text "VSYNC" at 4218.99,5726.38 h34 r90
  text "ON/!OFF" at 4024.65,5681.07 h34 r90
  text "40-Pin TFT Breakout" at 3043.98,5628.66 h42.5
  text "w/LED Boost &" at 3204.36,5296.16 h42.5
  text "4-Wire Touchscreen" at 3098.14,5221.16 h42.5
  text "R0" at 2425,5105 h34 r90
  text "R1" at 2525,5105 h34 r90
  text "R2" at 2625,5105 h34 r90
  text "R3" at 2725,5105 h34 r90
  text "R4" at 2825,5105 h34 r90
  text "R5" at 2925,5105 h34 r90
  text "R6" at 3025,5105 h34 r90
  text "R7" at 3125,5105 h34 r90
  text "B0" at 3225,5105 h34 r90
  text "B1" at 3325,5105 h34 r90
  text "B2" at 3425,5105 h34 r90
  text "B3" at 3525,5105 h34 r90
  text "B4" at 3625,5105 h34 r90
  text "B5" at 3725,5105 h34 r90
  text "B6" at 3825,5105 h34 r90
  text "B7" at 3925,5105 h34 r90
  text "XR" at 4025,5105 h34 r90
  text "YD" at 4125,5105 h34 r90
  text "XL" at 4225,5105 h34 r90
  text "YU" at 4325,5105 h34 r90
  text "G1" at 2921.63,4114.68 h34 r90
  text "LK" at 2421.63,4103.35 h34 r90
  text "LA" at 2521.63,4103.35 h34 r90
  text "G0" at 2821.63,4103.35 h34 r90
  text "G2" at 3021.63,4103.35 h34 r90
  text "G3" at 3121.63,4103.35 h34 r90
  text "G4" at 3221.63,4103.35 h34 r90
  text "G5" at 3321.63,4103.35 h34 r90
  text "G6" at 3421.63,4103.35 h34 r90
  text "G7" at 3521.63,4103.35 h34 r90
  text "DE" at 4121.63,4103.35 h34 r90
  text "GND" at 2321.63,4069.36 h34 r90
  text "PWM" at 2621.63,4069.36 h34 r90
  text "GND" at 3621.63,4069.36 h34 r90
  text "CLK" at 3721.63,4069.36 h34 r90
  text "5VIN" at 2221.63,4041.04 h34 r90
  text "3.3V" at 2721.63,4041.04 h34 r90
  text "HSYNC" at 3921.63,4001.38 h34 r90
  text "VSYNC" at 4021.63,4001.38 h34 r90
  text "ON/!OFF" at 3827.29,3956.07 h34 r90
  text "40-Pin TFT Breakout" at 2846.62,3903.66 h42.5
  text "G1" at 4452.57,3799.68 h34 r90
  text "LK" at 3952.57,3788.35 h34 r90
  text "LA" at 4052.57,3788.35 h34 r90
  text "G0" at 4352.57,3788.35 h34 r90
  text "G2" at 4552.57,3788.35 h34 r90
  text "G3" at 4652.57,3788.35 h34 r90
  text "G4" at 4752.57,3788.35 h34 r90
  text "G5" at 4852.57,3788.35 h34 r90
  text "G6" at 4952.57,3788.35 h34 r90
  text "G7" at 5052.57,3788.35 h34 r90
  text "DE" at 5652.57,3788.35 h34 r90
  text "GND" at 3852.57,3754.36 h34 r90
  text "PWM" at 4152.57,3754.36 h34 r90
  text "GND" at 5152.57,3754.36 h34 r90
  text "CLK" at 5252.57,3754.36 h34 r90
  text "5VIN" at 3752.57,3726.04 h34 r90
  text "3.3V" at 4252.57,3726.04 h34 r90
  text "HSYNC" at 5452.57,3686.38 h34 r90
  text "VSYNC" at 5552.57,3686.38 h34 r90
  text "ON/!OFF" at 5358.23,3641.07 h34 r90
  text "40-Pin TFT Breakout" at 4377.56,3588.66 h42.5
  text "w/LED Boost &" at 3007,3571.16 h42.5
  text "4-Wire Touchscreen" at 2900.78,3496.16 h42.5
  text "R0" at 2227.64,3380 h34 r90
  text "R1" at 2327.64,3380 h34 r90
  text "R2" at 2427.64,3380 h34 r90
  text "R3" at 2527.64,3380 h34 r90
  text "R4" at 2627.64,3380 h34 r90
  text "R5" at 2727.64,3380 h34 r90
  text "R6" at 2827.64,3380 h34 r90
  text "R7" at 2927.64,3380 h34 r90
  text "B0" at 3027.64,3380 h34 r90
  text "B1" at 3127.64,3380 h34 r90
  text "B2" at 3227.64,3380 h34 r90
  text "B3" at 3327.64,3380 h34 r90
  text "B4" at 3427.64,3380 h34 r90
  text "B5" at 3527.64,3380 h34 r90
  text "B6" at 3627.64,3380 h34 r90
  text "B7" at 3727.64,3380 h34 r90
  text "XR" at 3827.64,3380 h34 r90
  text "YD" at 3927.64,3380 h34 r90
  text "XL" at 4027.64,3380 h34 r90
  text "YU" at 4127.64,3380 h34 r90
  text "w/LED Boost &" at 4537.94,3256.16 h42.5
  text "4-Wire Touchscreen" at 4431.72,3181.16 h42.5
  text "R0" at 3758.58,3065 h34 r90
  text "R1" at 3858.58,3065 h34 r90
  text "R2" at 3958.58,3065 h34 r90
  text "R3" at 4058.58,3065 h34 r90
  text "R4" at 4158.58,3065 h34 r90
  text "R5" at 4258.58,3065 h34 r90
  text "R6" at 4358.58,3065 h34 r90
  text "R7" at 4458.58,3065 h34 r90
  text "B0" at 4558.58,3065 h34 r90
  text "B1" at 4658.58,3065 h34 r90
  text "B2" at 4758.58,3065 h34 r90
  text "B3" at 4858.58,3065 h34 r90
  text "B4" at 4958.58,3065 h34 r90
  text "B5" at 5058.58,3065 h34 r90
  text "B6" at 5158.58,3065 h34 r90
  text "B7" at 5258.58,3065 h34 r90
  text "XR" at 5358.58,3065 h34 r90
  text "YD" at 5458.58,3065 h34 r90
  text "XL" at 5558.58,3065 h34 r90
  text "YU" at 5658.58,3065 h34 r90
Mechanical 23:
  text "+25mA" at 3073.62,5831.01 h34
  text "+25mA" at 3073.62,5741.01 h34
  text "Backlight: 24V max CC" at 3918.97,5713.93 h34
  text "25mA-125mA w/jumpers" at 3910.47,5653.93 h34
  text "+50mA" at 3073.62,5651.01 h34
  text "+25mA" at 2876.26,4106.01 h34
  text "+25mA" at 2876.26,4016.01 h34
  text "Backlight: 24V max CC" at 3721.61,3988.93 h34
  text "25mA-125mA w/jumpers" at 3713.11,3928.93 h34
  text "+50mA" at 2876.26,3926.01 h34
  text "+25mA" at 4407.2,3791.01 h34
  text "+25mA" at 4407.2,3701.01 h34
  text "Backlight: 24V max CC" at 5252.55,3673.93 h34
  text "25mA-125mA w/jumpers" at 5244.05,3613.93 h34
  text "+50mA" at 4407.2,3611.01 h34

## Text inside footprints (layer, text, board x,y; h text height)
C4: Top Overlay "+" at 8479.01,1815.15 h59.06 r90
J1: Mechanical 1 "Mech 2 - Clearance, move to internal plane if present" at 9903.82,800.98 h11.81 r270; Mechanical 1 "Mech 1 - Slot cut-out" at 9923.5,800.98 h11.81 r270; Mechanical 1 "Assign keep-out area to slot" at 9962.87,800.98 h11.81 r270; Mechanical 1 "Alert PCB fab to slot details" at 9943.19,800.98 h11.81 r270
Q2: Bottom Overlay "1" at 9742.01,2890.47 h59.06; Bottom Overlay "3" at 9755.43,2790.47 h59.06
U1: Top Overlay "DEV" at 6469.8,3357.95 h50 r90; Top Overlay "PN" at 6469.8,3357.95 h50 r90; Top Overlay "VAL" at 6469.8,3357.95 h50 r90; Top Overlay "TOL" at 6469.8,3357.95 h50 r90